# EAGLE board 2LD-17-mk-1.2.2 (EAGLE 7.5.0)
VERSION: v1.2
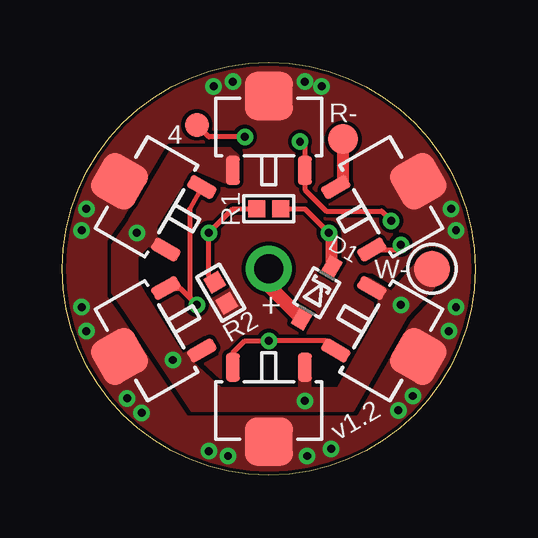
[diagram p0: board, top side]
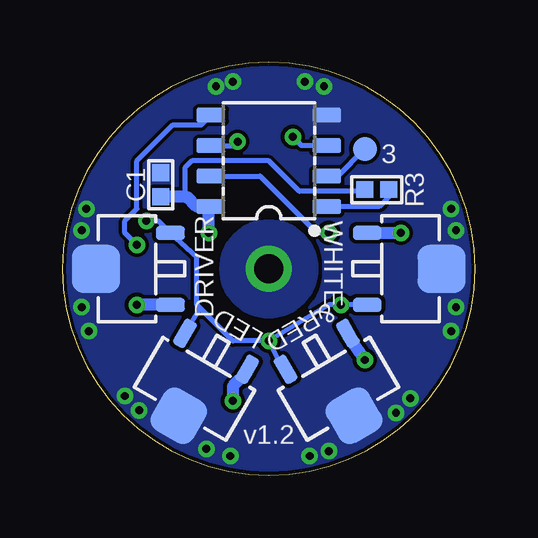
[diagram p1: board, bottom side, seen from below]

Size 17.2 x 17.2 mm. Coordinates in mm from the lower left corner, seen from the top.
Outline: 0,8.6 arc-180 17.2,8.6 arc-180 0,8.6
Copper layers (1*16): Top 0.0356mm / dielectric 1.5011mm / Bottom 0.0356mm
Design rules "LaenPCBOrder2": minimum track width 6mil, minimum drill 13mil, track to track 6mil, track to pad 6mil, pad to pad 6mil, via to via 6mil, smd to smd 6mil, copper to edge 6mil, drill to drill 6mil, minimum pad ring 7mil, minimum via ring 7mil, stop-mask expansion 3mil, vias tented up to drill 20mil, thermal gap 10mil

## Footprints (pad centres in the part's own frame; a part is rotated, then mirrored left to right if it is on the bottom)
1X01-SMD-1MM-DIA-NS = smd 1 x 1: P$1 0,0
1X01-1.2MM-NS = drill 1.2 pad 1.93: P$1 0,0
C0402 = smd 0.7 x 0.7: 1 -0.5,0; 2 0.5,0
SOD323-SCHOTTKY = smd 0.8 x 0.6: A -1.25,0; C 1.25,0
R0402 = smd 0.7 x 0.7: 1 -0.5,0; 2 0.5,0
1X01-SMD-1.25MM-DIA-NS = smd 1.25 x 1.25: P$1 0,0
SO08-NARROWER = smd 0.6 x 1.2: 1 -1.905,-2.416; 2 -0.635,-2.416; 3 0.635,-2.416; 4 1.905,-2.416; 5 1.905,2.416; 6 0.635,2.416; 7 -0.635,2.416; 8 -1.905,2.416
SOT89-NOTHERM-ROUNDED-LESS = smd 0.58 x 1.2: 1 -1.5,-1.8; 3 1.5,-1.8 | smd 2 x 2: 4 0,1.3
1X01-SMD-1.5MM-DIA-NS = smd 1.5 x 1.5: P$1 0,0

## Placement (x,y rotation side)
3  M01SMD-1MM-DIA-NS  [1X01-SMD-1MM-DIA-NS]  4.6,13.6 0 bottom
4  M01SMD-1MM-DIA-NS  [1X01-SMD-1MM-DIA-NS]  5.6,14.6 0 top
+  M01PTH-1.2MM-NS  [1X01-1.2MM-NS]  8.6,8.6 90 top
C1  1u  [C0402]  13.1,12.1 90 bottom
D1  BAT165  [SOD323-SCHOTTKY]  10.6,7.6 60 top
FRAME1  FRAME-LETTERNO_PACKAGE  [DUMMY]  0.1,0.1 0 top
R1  19K  [R0402]  8.6,11.1 0 top
R2  4K7  [R0402]  6.6,7.6 120 top
R3  10K  [R0402]  4.1,11.9 180 bottom
R-  M01SMD-1.25MM-DIA  [1X01-SMD-1.25MM-DIA-NS]  11.7,14 0 top
U0  Tiny25  [SO08-NARROWER]  8.6,13.1 90 bottom
U1  AMC7135  [SOT89-NOTHERM-ROUNDED-LESS]  8.6,14.5 0 top
U2  AMC7135  [SOT89-NOTHERM-ROUNDED-LESS]  14.5,8.6 90 bottom
U3  AMC7135  [SOT89-NOTHERM-ROUNDED-LESS]  13.7,5.6 240 top
U4  AMC7135  [SOT89-NOTHERM-ROUNDED-LESS]  8.6,2.7 180 top
U5  AMC7135  [SOT89-NOTHERM-ROUNDED-LESS]  3.5,5.6 120 top
U6  AMC7135  [SOT89-NOTHERM-ROUNDED-LESS]  3.5,11.6 60 top
U7  AMC7135  [SOT89-NOTHERM-ROUNDED-LESS]  11.7,3.6 150 bottom
U8  AMC7135  [SOT89-NOTHERM-ROUNDED-LESS]  5.7,3.6 210 bottom
U9  AMC7135  [SOT89-NOTHERM-ROUNDED-LESS]  2.7,8.6 270 bottom
U10  AMC7135  [SOT89-NOTHERM-ROUNDED-LESS]  13.7,11.6 300 top
W-  M01SMD-1.5MM-DIA-NS  [1X01-SMD-1.5MM-DIA-NS]  15.4,8.6 270 top

## Library data of the parts
3 4 + C1 D1 R1-R3 R- U0 U1-U10 W- = a_parts
FRAME1 = a_parts; DESIGNER: sean@yak.net; VERSION: v1.2

## Nets
3: 3.P$1 U0.2
4: 4.P$1 U0.3
BATT_DIV: R1.1 R2.2 U0.7
GND: C1.2 R2.1 U0.4 U1.4 U2.4 U3.4 U4.4 U5.4 U6.4 U7.4 U8.4 U9.4 U10.4
N$1: R3.1 U0.1
PWM_R: U0.5 U10.3
PWM_W: U0.6 U1.3 U2.3 U3.3 U4.3 U5.3 U6.3 U7.3 U8.3 U9.3
RED_K: R-.P$1 U10.1
VBAT: +.P$1 D1.A
VCC: C1.1 D1.C R1.2 R3.2 U0.8
WHITE_K: U1.1 U2.1 U3.1 U4.1 U5.1 U6.1 U7.1 U8.1 U9.1 W-.P$1

## Tracks (layer width: path | path; a pad name or v marks a point on that pad's centre or on a via)
3
  Bottom 0.2: U0.2 5.73,12.47 3.P$1
4  (via drill 0.33)
  Top 0.2: v7.6,14.1 6.1,14.1 4.P$1
  Bottom 0.2: U0.3 7.23,13.74 v7.6,14.1
BATT_DIV  (via drill 0.33)
  Top 0.2: R2.2 6.1,8.28 v6.1,10.1 7.1,11.1 R1.1
  Bottom 0.2: U0.7 8.96,12.47 6.6,10.1 v6.1,10.1
GND  (via drill 0.33)
  other vias: 0.8,7 2.7,3.2 3.3,2.6 1,6 6.1,1 6.9,0.8 10.2,0.8 11.2,1.1 14,2.7 14.6,3.3 16.1,6 16.4,7 16.4,10.2 16.2,11.1 0.8,10.2 1,11.1 7.1,16.4 10.1,16.4 6.3,16.2 10.8,16.2
  pour Top (isolate 0.152, rank 6, no thermals): 0.1,8.6 arc90 8.6,0.1 arc90 17.1,8.6 arc90 8.6,17.1 arc90
  pour Bottom (isolate 0.152, rank 6, no thermals): 17.1,8.6 arc-90 8.6,0.1 arc-90 0.1,8.6 arc-90 8.6,17.1 arc-90
N$1
  Bottom 0.2: R3.1 3.6,11.6 4,11.2 U0.1
PWM_R  (via drill 0.33)
  Top 0.2: U10.3 13.9,9.4 v14.1,9.6
  Bottom 0.2: v14.1,9.6 14.6,10.1 14.6,10.6 14.1,11.1 14.1,13.1 12.6,14.6 11.42,14.6 U0.5
PWM_W  (via drill 0.33)
  Top 0.2: v9.9,13.9 10.1,13.7 U1.3 10.1,11.9 11,11 13.3,11 v13.7,10.6 | U5.3 4.9,7.8 v5.6,7.1 5.3,7.4 5.3,11.1 U6.3 | U4.3 7.1,5.1 7.6,5.6 v8.6,5.6 10.99,5.6 U3.3
  Bottom 0.2: U0.6 10.06,13.74 v9.9,13.9 | U8.3 8.1,4.61 v8.6,5.6 | v8.6,5.6 10.1,5.6 11.45,6.95 | 11.45,6.95 11.6,7.1 11.6,9.1 U2.3 13.2,10.6 v13.7,10.6 | U7.3 11.45,6.95 | U9.3 v5.6,7.1 6.1,7.1 v8.6,5.6
RED_K
  Top 0.5: U10.1 11.7,12.21 R-.P$1
VBAT
  Top 0.575: +.P$1 8.6,7.89 D1.A
  pour Bottom (isolate 0.152, no thermals): 6.6,8.6 arc-180 10.6,8.6 arc-180
VCC  (via drill 0.33)
  Top 0.2: R1.2 10.1,11.1 v11.1,10.1
  Top 0.5: D1.C 11.22,9.98 v11.1,10.1
  Bottom 0.2: R3.2 4.67,11.83 7.33,11.83 8.6,13.1 11.8,13.1 12.1,12.8 12.1,11.6
  Bottom 0.5: C1.1 12.1,11.6 12,11.6 11.59,11.2 U0.8 11.1,11.11 v11.1,10.1
WHITE_K  (via drill 0.33)
  Bottom 0.5: U8.1 5.3,5.8 v4.6,4.8 | U7.1 9.5,4.3 10.1,3.7 v10.1,3.1 | U2.1 v14.1,7.1 | U9.1 v3.1,10.1
  pour Top (isolate 0.152, rank 2, no thermals): 12.7,8.2 13.7,7.6 15,9.1 15.7,9.1 16,8.4 14.3,6.6 12.1,2.7 5.4,2.7 2.6,6.9 2.1,7.6 2.1,9.6 2.8,10.6 4.6,13.6 7,13.6 7.3,13.3 7.3,12.3 6.8,12.2 5.4,12.8 3.9,10.4 3.9,9.8 4.8,9.3 4.6,9 3.6,9.6 3.1,9.1 3.1,8.1 3.5,7.4 5,5 5.2,5.1 6.1,5.6 6.3,5.2 5.4,4.7 6.6,3.6 9.9,3.6 9.9,4.7 10.3,4.7 10.3,3.6 11.5,3.6 13.2,6.7 13.2,7.4 12.5,7.8

## Text on the board
bPlace: WHITE | DRIVER | & | RED | LED